# Altium PCB PCB_OBDH_ALT.PcbDoc
Units mil, origin at the board's own origin, x right, y up, seen from the top; angles counter-clockwise.
Board outline 3627.19 x 3509.21 mil, 2 copper layers (Top Layer, Bottom Layer), stack 65.792 mil thick; 1 components, 80 nets, 108 pads, 0 vias.
Unrouted connection lines stored in the file: 2.
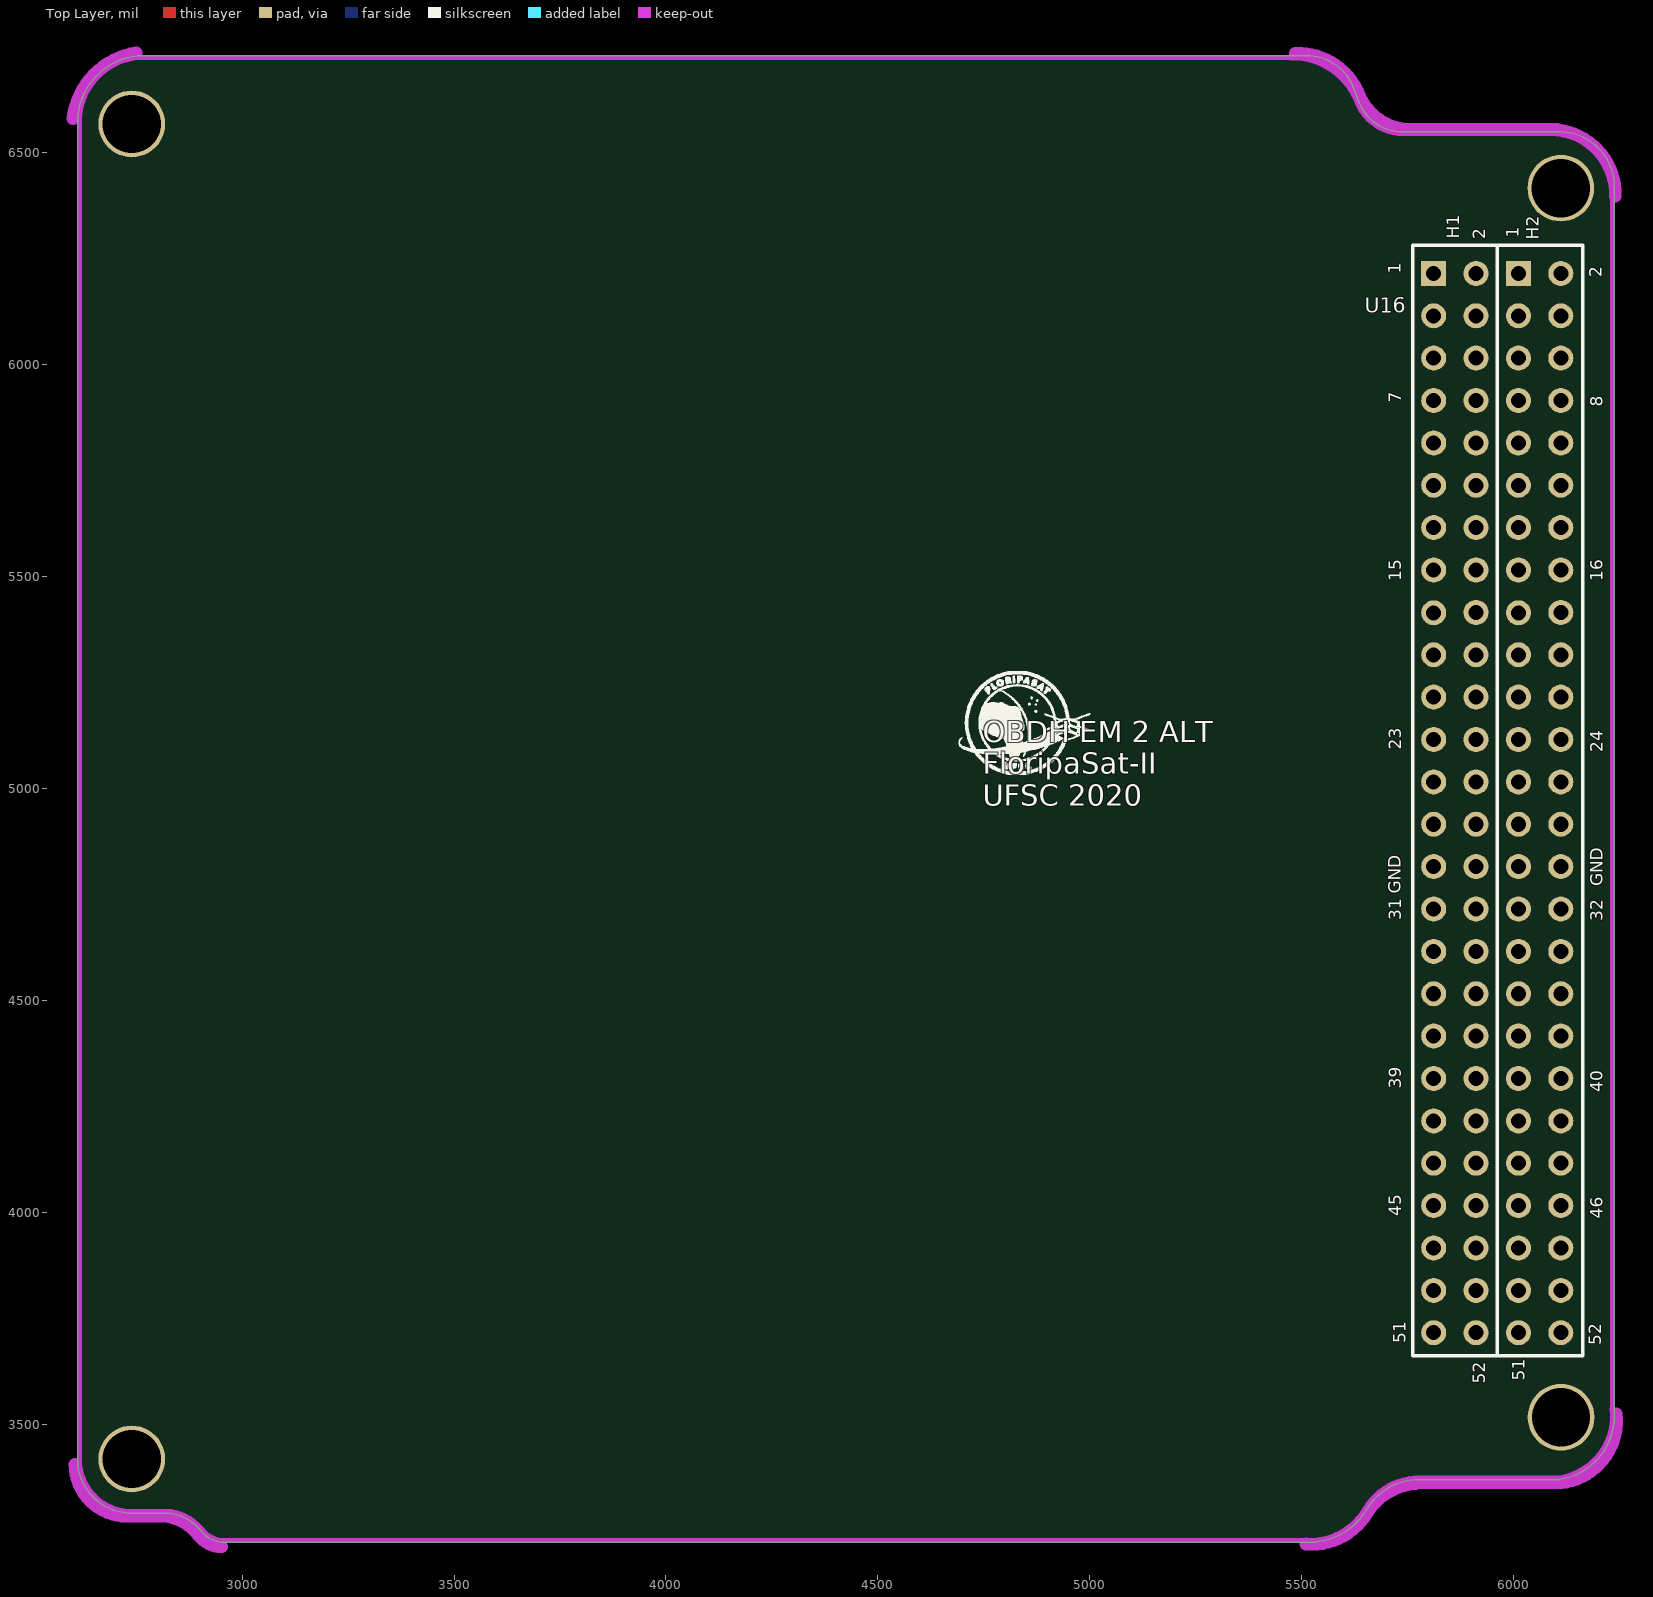
[diagram p0: Top Layer view]
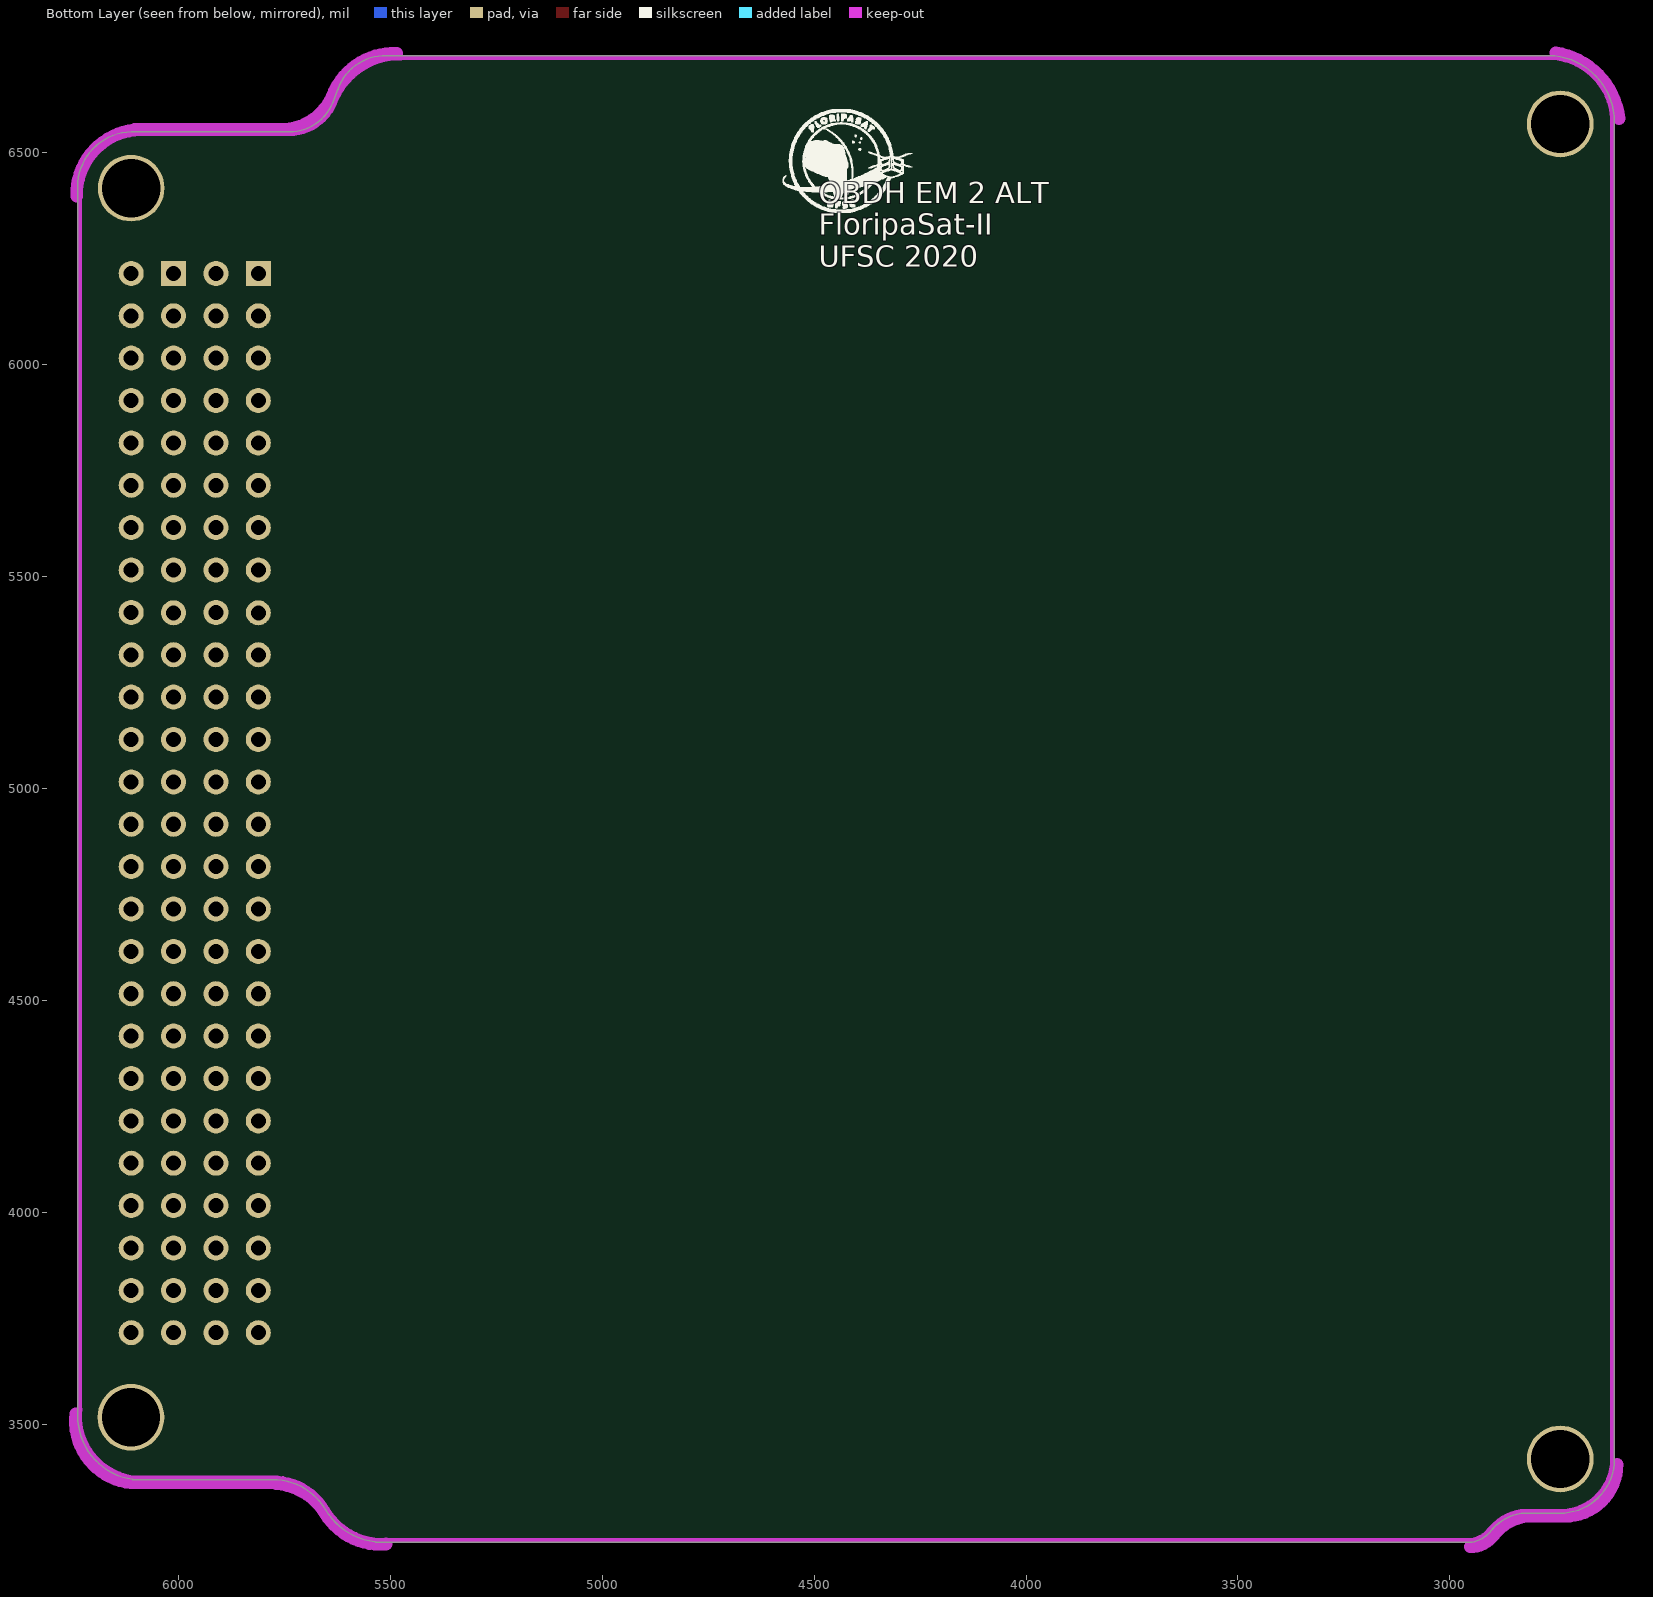
[diagram p1: Bottom Layer view, seen from below]

## Layer stack, top to bottom
Top Solder: solder mask 0.4, Solder Resist, Dk 3.5
Top Layer: signal copper 1.4
Dielectric1: core 62.9921, FR-4, Dk 4.8
Bottom Layer: signal copper 1.4
Bottom Solder: solder mask 0.4, Solder Resist, Dk 3.5

## Board outline
2831.44,3289.79 cw(c2812.42,3175.14) 2904.91,3245.51 ccw(c2908.9,3248.54) 2905.12,3245.25 ccw(c2959.02,3292.21) 2959.83,3220.73 ccw(c2959.02,3292.21) 2959.86,3220.73 2959.8,3220.73 5532.68,3220.73 ccw(c5532.68,3225.74) 5536.28,3222.25 ccw(c5517.9,3378.72) 5653.34,3298.25 ccw(c5649.03,3300.81) 5653.35,3298.26 cw(c5777.23,3224.98) 5766.72,3368.53 6105.67,3368.53 ccw(c6105.67,3373.54) 6108.5,3369.4 ccw(c6086.18,3519.83) 6238.26,3519.83 ccw(c6086.18,3519.83) 6237.57,3534.25 6237.57,6414.22 ccw(c6233.43,6417.05) 6238.44,6416.93 ccw(c6108.52,6419.9) 6238.47,6419.9 ccw(c6108.52,6419.9) 6111.49,6549.82 ccw(c6111.38,6544.8) 6111.38,6549.82 5739.03,6549.82 ccw(c5739.03,6544.8) 5738.79,6549.81 ccw(c5738.53,6544.8) 5738.55,6549.82 cw(c5739.03,6661.14) 5635.62,6619.92 ccw(c5630.97,6618.06) 5634.8,6621.29 5623.88,6649.65 ccw(c5619.2,6647.84) 5623.58,6650.28 ccw(c5618.56,6650.28) 5623.58,6650.28 ccw(c5618.56,6650.28) 5623.28,6651.99 ccw(c5512.63,6611.96) 5518.67,6729.47 ccw(c5516.57,6724.92) 5516.57,6729.94 2766.89,6729.94 ccw(c2766.89,6724.92) 2766.27,6729.9 ccw(c2765.97,6724.89) 2765.87,6729.91 ccw(c2769,6572.35) 2611.42,6573.52 ccw(c2616.3,6572.35) 2611.28,6572.35 2611.28,3416.85 ccw(c2616.3,3416.85) 2611.28,3416.81 ccw(c2739.33,3417.83) 2740.33,3289.79 ccw(c2739.33,3417.83) 2740.36,3289.79 2740.32,3289.79

## Design rules (kind name [scope] priority, off if disabled: settings)
Clearance Clearance_6 [InNet('GND') vs InNet('AGND')] p1: gap=15 ignorepadtopadclearanceinfootprint=FALSE except(0: Arc-Hole Track-Hole SMDPad-Hole THPad-Hole Via-Hole Fill-Hole Poly-Hole Region-Hole Text-Hole)
Clearance [All] p2: gap=7 ignorepadtopadclearanceinfootprint=FALSE except(0: Arc-Hole Track-Hole SMDPad-Hole THPad-Hole Via-Hole Fill-Hole Poly-Hole Region-Hole Text-Hole)
DiffPairsRouting DiffPairsRouting_1 [InDifferentialPair('XT2')] p1: maxlimit=10 minlimit=10 mostfreqgap=10 toplayer_minwidth=10 toplayer_maxwidth=10 toplayer_prefwidth=10 bottomlayer_minwidth=10 bottomlayer_maxwidth=10 bottomlayer_prefwidth=10 maxuncoupledlength=500
DiffPairsRouting [All] p2: maxlimit=10 minlimit=10 mostfreqgap=10 toplayer_minwidth=15 toplayer_maxwidth=15 toplayer_prefwidth=15 bottomlayer_minwidth=15 bottomlayer_maxwidth=15 bottomlayer_prefwidth=15 maxuncoupledlength=500
HoleSize [All] p1: absolutevalues=TRUE maxlimit=200 minlimit=1 maxpercent=80.000 minpercent=20.000
MinimumSolderMaskSliver [All] p1: minsoldermaskwidth=0
PlaneConnect [InNetClass('power')] p1: planeconnectstyle=Direct reliefexpansion=20 reliefentries=4 reliefconductorwidth=10 reliefairgap=10
PlaneConnect PlaneConnect_1 [All] p2: planeconnectstyle=Relief reliefexpansion=20 reliefentries=4 reliefconductorwidth=10 reliefairgap=10
PolygonConnect PolygonConnect_3 [InNet('GND') vs InNet('GND')] p1: connectstyle=Direct reliefconductorwidth=10 reliefentries=4 polygonreliefangle="90 Angle" airgapwidth=10
PolygonConnect PolygonConnect_2 [InNet('AGND') vs InNet('AGND')] p2: connectstyle=Direct reliefconductorwidth=10 reliefentries=4 polygonreliefangle="90 Angle" airgapwidth=10
PolygonConnect [InNetClass('power')] p3: connectstyle=Direct reliefconductorwidth=10 reliefentries=4 polygonreliefangle="90 Angle" airgapwidth=10
PolygonConnect PolygonConnect_1 [All] p4: connectstyle=Relief reliefconductorwidth=10 reliefentries=4 polygonreliefangle="90 Angle" airgapwidth=10
RoomDefinition 1_Interface [InComponentClass('1_Interface')] p1: confinementstyle=ConfineIn formatcopy=TRUE lockcomponents=FALSE outline 7026.38,6166.14 7794.88,6166.14 7794.88,6650.79 7026.38,6650.79
RoutingVias [All] p1: holewidth=10 width=20 viastyle="Through Hole" minholewidth=5 minwidth=10 maxholewidth=10 maxwidth=25
SilkToSilkClearance [All] p1: silktosilkclearance=5
SilkToSolderMaskClearance [IsPad] p1: minsilkscreentomaskgap=0 clearancetoexposedcopper=TRUE
SolderMaskExpansion [All] p1: expansion=7
Width Width_Power [InNetClass('Power')] p1: maxlimit=30 minlimit=20 preferedwidth=20
Width [All] p2: maxlimit=70 minlimit=5 preferedwidth=10
24 further rules are at their usual default settings.

## Classes and differential pairs
differential pair VSENSE2: +VSENSE2_P -VSENSE2_N
differential pair XT2: +XT2_P -XT2_N

## Components (designator, comment, footprint, x,y, rotation, side; value= is the part's Value field where it differs from the comment)
U16 "PC104_INTERNAL" PC104 6114.96,3715.75 r90 top locked

## Footprints (in the part's own frame and the unit in brackets; to place one, negate y for a bottom-side part, rotate by r counter-clockwise, add the part's x,y. Pads: shape width x height; smd on the part's side, far side on the other; paste and mask are expansions set on the pad)
PC104 [mm] "Connector; Header; 26x4 Position"
  rect 1.5x1.5 hole 0.9: H1-1(63.5,7.7) H2-1(63.5,2.625)
  round 1.5 hole 0.9: H1-2(63.5,5.16) H1-3(60.96,7.7) H1-4(60.96,5.16) H1-5(58.42,7.7) H1-6(58.42,5.16) H1-7(55.88,7.7) H1-8(55.88,5.16) H1-9(53.34,7.7) H1-10(53.34,5.16) H1-11(50.8,7.7) H1-12(50.8,5.16) H1-13(48.26,7.7) H1-14(48.26,5.16) H1-15(45.72,7.7) H1-16(45.72,5.16) H1-17(43.155,7.7) H1-18(43.18,5.16) H1-19(40.64,7.7) H1-20(40.64,5.16) H1-21(38.1,7.7) H1-22(38.1,5.16) H1-23(35.56,7.7) H1-24(35.56,5.16) H1-25(33.02,7.7) H1-26(33.02,5.16) H1-27(30.48,7.7) H1-28(30.48,5.16) H1-29(27.94,7.7) H1-30(27.94,5.16) H1-31(25.4,7.7) H1-32(25.4,5.16) H1-33(22.86,7.7) H1-34(22.86,5.16) H1-35(20.32,7.7) H1-36(20.32,5.16) H1-37(17.78,7.7) H1-38(17.78,5.16) H1-39(15.24,7.7) H1-40(15.24,5.16) H1-41(12.7,7.7) H1-42(12.7,5.16) H1-43(10.16,7.7) H1-44(10.16,5.16) H1-45(7.62,7.7) H1-46(7.62,5.16) H1-47(5.08,7.7) H1-48(5.08,5.16) H1-49(2.54,7.7) H1-50(2.54,5.16) H1-51(0,7.7) H1-52(0,5.16) H2-2(63.5,0.08) H2-3(60.96,2.62) H2-4(60.96,0.08) H2-5(58.42,2.62) H2-6(58.42,0.08) H2-7(55.88,2.62) H2-8(55.88,0.08) H2-9(53.34,2.625) H2-10(53.34,0.08) H2-11(50.8,2.625) H2-12(50.8,0.08) H2-13(48.26,2.62) H2-14(48.26,0.08) H2-15(45.72,2.62) H2-16(45.72,0.08) H2-17(43.155,2.62) H2-18(43.18,0.08) H2-19(40.64,2.62) H2-20(40.64,0.08) H2-21(38.1,2.62) H2-22(38.1,0.08) H2-23(35.56,2.62) H2-24(35.56,0.08) H2-25(33.02,2.62) H2-26(33.02,0.08) H2-27(30.48,2.62) H2-28(30.48,0.08) H2-29(27.94,2.62) H2-30(27.94,0.08) H2-31(25.4,2.62) H2-32(25.4,0.08) H2-33(22.86,2.62) H2-34(22.86,0.08) H2-35(20.32,2.62) H2-36(20.32,0.08) H2-37(17.78,2.62) H2-38(17.78,0.08) H2-39(15.24,2.62) H2-40(15.24,0.08) H2-41(12.7,2.62) H2-42(12.7,0.08) H2-43(10.16,2.62) H2-44(10.16,0.08) H2-45(7.62,2.62) H2-46(7.62,0.08) H2-47(5.08,2.62) H2-48(5.08,0.08) H2-49(2.54,2.62) H2-50(2.54,0.08) H2-51(0,2.62) H2-52(0,0.08)
  silkscreen extent -1.38,-1.22 65.18,8.97, body extent -1.47,-1.06 65.1,8.92, height 13.51

## Part data
U16: library part PC104, "PC104", Partnumber=ESQ-126-39-G-D

## Free pads (board coordinates)
  round 157.48 hole 137.8: 0(2739.33,3417.83) 1(6112.36,3516.26) 2(6112,6417) 3(2739.33,6568.43)

## Nets (pads, with @x,y where several pads share a name; then routed paths per layer and width w, separated by ;. In a path a pad name is that pad's centre, name@x,y a point inside that pad or via, vN(x,y) a via of type N, cw(c..) or ccw(c..) an arc to the next point about the centre after c; other vN are vias at no path point)
3V3_C_CURRENT_CIRCUIT: 
3V3_CURRENT_SENSING: 
3V3_MEMORY: 
\M\R\_WDOG: 
A3V3_OBDH: 
ADC_VCC_3V3: 
AGND: 
ANTENNA_DEBUG: 
GND: U16.H1-29 U16.H1-30 U16.H1-31 U16.H1-32 U16.H2-29 U16.H2-30 U16.H2-31 U16.H2-32
I2C0_SCL: U16.H1-43
I2C0_SDA: U16.H1-41
I2C1_SCL: 
I2C1_SDA: 
I2C2_SCL: 
I2C2_SDA: 
JTAG_TCK: 
JTAG_TDO: 
LED_SYSTEM: 
NetC27_1: 
NetC28_2: 
NetC39_1: 
NetD1_1: 
NetD3_1: 
NetD4_1: 
NetR27_1: 
NetR48_2: 
NetTP20_1: 
NetTP21_1: 
NetTP22_1: 
NetTP23_1: 
NetTP24_1: 
NetTP25_1: 
NetTP29_1: 
NetTP30_1: 
NetTP31_1: 
NetTP32_1: 
NetTP33_1: 
NetTP34_1: 
NetTP35_1: 
NetTP36_1: 
NetTP37_1: 
NetTP38_1: 
NetTP39_1: 
NetTP40_1: 
NetTP45_1: 
OBDH_CURRENT_ADC: 
PAYLOAD_0_EN: U16.H1-18
PAYLOAD_1_EN: U16.H1-20
SPI0_CLK: U16.H1-35
SPI0_CSN: U16.H1-40
SPI0_MISO: U16.H1-37
SPI0_MOSI: U16.H1-39
SPI1_CLK: 
SPI1_MISO: 
SPI1_MOSI: 
TTC_3V3_PA_EN: U16.H1-12
TTC_CTRL_RF_SWT_RX: U16.H1-5
TTC_CTRL_RF_SWT_TX: U16.H1-6
TTC_GPIO0_MAIN: U16.H1-7
TTC_GPIO1_MAIN: U16.H1-8
TTC_GPIO2_MAIN: U16.H1-9
TTC_RESETN_MAIN: U16.H1-11
UART0_RX: 
UART0_TX: 
UC_BEACON_0: U16.H2-12
UC_BEACON_1: U16.H2-11
UC_BEACON_2: U16.H2-14
UC_BEACON_3: U16.H2-13
VCC_3V3: 
VCC_3V3_DEPLOYMENT: U16.H2-35 U16.H2-36
VCC_3V3_SOURCE: U16.H1-45 U16.H1-46
VCC_5V_EN: U16.H1-13
VREF: 
VSENSE2_N: 
VSENSE2_P: 
WDI_EXT: 
XT1IN: 
XT1OUT: 
XT2_N: 
XT2_P: 
pads on no net: U16.H1-1 U16.H1-2 U16.H1-3 U16.H1-4 U16.H1-10 U16.H1-14 U16.H1-15 U16.H1-16 U16.H1-17 U16.H1-19 U16.H1-21 U16.H1-22 U16.H1-23 U16.H1-24 U16.H1-25 U16.H1-26 U16.H1-27 U16.H1-28 U16.H1-33 U16.H1-34 U16.H1-36 U16.H1-38 U16.H1-42 U16.H1-44 U16.H1-47 U16.H1-48 U16.H1-49 U16.H1-50 U16.H1-51 U16.H1-52 U16.H2-1 U16.H2-2 U16.H2-3 U16.H2-4 U16.H2-5 U16.H2-6 U16.H2-7 U16.H2-8 U16.H2-9 U16.H2-10 U16.H2-15 U16.H2-16 U16.H2-17 U16.H2-18 U16.H2-19 U16.H2-20 U16.H2-21 U16.H2-22 U16.H2-23 U16.H2-24 U16.H2-25 U16.H2-26 U16.H2-27 U16.H2-28 U16.H2-33 U16.H2-34 U16.H2-37 U16.H2-38 U16.H2-39 U16.H2-40 U16.H2-41 U16.H2-42 U16.H2-43 U16.H2-44 U16.H2-45 U16.H2-46 U16.H2-47 U16.H2-48 U16.H2-49 U16.H2-50 U16.H2-51 U16.H2-52

## Keep-outs
Keep-Out Layer:
  lines w10: 2616.3,6572.35 2616.3,3416.85 ccw(c2739.33,3417.83) 2740.31,3294.8 2831.85,3294.8 cw(c2812.42,3175.14) 2908.9,3248.54 ccw(c2959.02,3292.21) 2959.8,3225.74 5532.68,3225.74 ; 2616.46,6569.32 cw(c2769,6572.35) 2765.97,6724.89 ; 2766.89,6724.92 5476.94,6724.92 ; 5474.33,6723.77 cw(c5476.94,6559.08) 5631.83,6615.11 ; 5504.57,3226.78 ccw(c5517.9,3378.72) 5649.03,3300.81 cw(c5777.23,3224.98) 5766.54,3373.54 6105.67,3373.54 ; 5630.97,6618.06 ccw(c5739.03,6661.14) 5738.53,6544.8 ; 5739.03,6544.8 6111.38,6544.8 cw(c6108.52,6419.9) 6233.43,6417.05 ; 6101.97,3373.62 ccw(c6086.18,3519.83) 6232.3,3536.44 ; 6232.56,3529.84 6232.56,6419.91
  lines w30: 2600.39,6581.1 cw(c2778.8,6559.28) 2749.91,6736.67 ; 2605.12,3404.73 ccw(c2728.15,3405.71) 2729.13,3282.68 2820.67,3282.68 cw(c2801.24,3163.01) 2897.72,3236.42 ; 2901.07,3233.43 ccw(c2951.19,3277.1) 2951.97,3210.63 ; 5485.83,6735.04 cw(c5491.51,6579.93) 5630.4,6649.22 ; 5510.37,3216.89 ccw(c5523.7,3368.84) 5647.64,3279.92 ; 5631.59,6647.95 ccw(c5758.64,6688.44) 5749.21,6555.43 6103.46,6555.43 ; 5651.97,3286.61 cw(c5780.17,3210.78) 5769.47,3359.35 ; 5773.07,3361.42 6112.2,3361.42 ccw(c6096.42,3507.63) 6242.54,3524.23 ; 6090.82,6555 cw(c6087.32,6401.7) 6240.61,6398.2

## Silkscreen, mask and mechanical layers (free items; w line width, h text height)
Top Overlay:
  drawing of 1547 lines, arcs and shapes, not listed
  text "7" at 5735.43,5910.24 h29.53 r90
  text "8" at 6210.24,5900.79 h29.53 r90
  text "15" at 5735.43,5488.98 h29.53 r90
  text "16" at 6210.24,5488.98 h29.53 r90
  text "23" at 5735.43,5092.13 h29.53 r90
  text "24" at 6210.24,5085.43 h29.53 r90
  text "OBDH EM 2 ALT / FloripaSat-II / UFSC 2020" at 4747.64,4959.84 h50
  text "GND" at 6210.24,4768.9 h29.53 r90
  text "GND" at 5733.86,4751.97 h29.53 r90
  text "31" at 5735.43,4689.76 h29.53 r90
  text "32" at 6210.24,4687.01 h29.53 r90
  text "39" at 5735.43,4290.94 h29.53 r90
  text "40" at 6210.24,4283.86 h29.53 r90
  text "45" at 5735.43,3990.55 h29.53 r90
  text "46" at 6210.24,3985.04 h29.53 r90
Bottom Overlay:
  drawing of 1531 lines, arcs and shapes, not listed
  text "OBDH EM 2 ALT / FloripaSat-II / UFSC 2020" at 4489.37,6231.5 h50
Mechanical 1:
  lines w10: 2258.66,6727.56 6438.19,6727.17 ; 2335.04,3220.87 6406.69,3220.48 ; 2387.17,3280.9 2407.09,3220.87 ; 2392.12,6668.38 2412.2,6728.35 ; 2397.09,3220.88 2417.09,3220.85 ; 2402.2,6728.36 2422.2,6728.33 ; 2409.07,4578.73 2407.09,3220.87 ; 2410.22,5370.48 2412.2,6728.35 ; 2427.17,3280.84 2407.09,3220.87 ; 2432.12,6668.32 2412.2,6728.35 ; 2544.88,444.09 8222.92,444.09 8222.92,1498.33 ; 2568.5,444.09 885.43,444.09 885.43,7329.53 8222.92,7329.53 8222.92,447.64 ; 2572.92,444.09 2572.92,1496.32 8222.92,1496.32 ; 2572.92,621.32 7822.92,621.32 ; 2572.92,808.82 8222.92,808.82 ; 2572.92,996.32 8218.69,996.32 ; 2613.79,2999.61 2614.17,7069.69 ; 2614.55,6999.37 2614.58,6979.37 ; 2674.54,7009.44 2614.57,6989.37 ; 2674.59,6969.44 2614.57,6989.37 ; 4028.93,6991.06 2614.57,6989.37 ; 4410.42,621.32 4410.42,996.32 ; 4820.68,6992.01 6235.04,6993.7 ; 6175.02,7013.63 6235.04,6993.7 ; 6175.06,6973.63 6235.04,6993.7 ; 6222.92,433.82 6222.92,1496.32 ; 6222.92,621.32 8222.92,621.32 ; 6235.05,6983.7 6235.03,7003.7 ; 6235.44,3061.02 6235.82,7099.21 ; 6300,3456 6320,3516 ; 6300,3776.24 6320,3716.24 ; 6310,3516 6330,3516 ; 6310,3716.24 6330,3716.24 ; 6320,3416 6320,3516 ; 6320,3816.24 6320,3716.24 ; 6340,3456 6320,3516 ; 6340,3776.24 6320,3716.24 ; 6378,6156.76 6398,6216.76 ; 6378,6477 6398,6417 ; 6388,6216.76 6408,6216.76 ; 6388,6417 6408,6417 ; 6398,6116.76 6398,6216.76 ; 6398,6517 6398,6417 ; 6418,6156.76 6398,6216.76 ; 6418,6477 6398,6417 ; 7222.92,433.82 7222.92,808.82 ; 7374.2,989.52 7374.2,1497.24
  text "3620.475 (mil)" at 4038.97,6955.08 h60 r0.07
  text "200.24 (mil)" at 6541.96,5990.98 h60 r90
  text "3507.484 (mil)" at 2445.07,4588.68 h60 r89.92
  text "200.24 (mil)" at 6463.96,3290.22 h60 r90
  text "General SPEC:" at 6386.41,2347.94 h121.88
  text "Cupper base 1OZ:" at 6369.68,2192.81 h68.12
  text "PCB Material: FR4" at 6362.6,2090.16 h68.12
  text "PCB Tickness: 1.6mm" at 6368.46,1981.91 h68.12
  text "PCB Surface: ENIG" at 6365.53,1873.67 h68.12
  text "Vias: Force Complete Tenting" at 6351.57,1768.11 h68.12
  text "VER." at 7505.69,1340.54 h95
  text "TITULO: OBDH 2018" at 2651.57,1320.08 h100
  text "REV." at 6366.33,1315.19 h95
  text "Eng_2_ALT" at 7485.43,1107.48 h75.62
  text "01" at 6404.17,1085.81 h75.62
  text "UFSC" at 2662.6,1050.39 h75.62
  text "MATERIAL:" at 2610.42,871.32 h75.62
  text "FR4" at 3272.92,871.32 h75.62
  text "Silkscreen color: white" at 4472.92,871.32 h75.62
  text "1.6mm" at 3771.73,701.54 h75.62
  text "Drawing" at 6284.19,695.41 h75.62
  text "Board Tickness:" at 2610.42,683.82 h75.62
  text "Layers: 02" at 4472.92,683.82 h75.62
  text "DATE" at 7587.92,679.82 h75.62
  text "01/12/2019" at 7403.15,504.33 h75.62
  text "Andre M. P. Mattos" at 6270.84,490.78 h68.12
  text "PCB Surface: ENIG" at 2618.73,479.2 h68.12
ASM Top:
  lines w3.94: 5762,3661.74 5762,6273.94 6163,6273.94 6163,3661.74 5762,3661.74
  text "U16" at 5866.93,5646.06 h39.37 r90

## Text inside footprints (layer, text, board x,y; h text height)
U16: Top Overlay "1" at 6012.6,6300.39 h29.53 r90; Top Overlay "2" at 6208.66,6207.09 h29.53 r90; Top Overlay "2" at 5933.46,6296.85 h29.53 r90; Top Overlay "1" at 5734.65,6214.57 h29.53 r90; Top Overlay "52" at 6207.09,3686.61 h29.53 r90; Top Overlay "51" at 6026.38,3602.36 h29.53 r90; Top Overlay "51" at 5746.46,3691.34 h29.53 r90; Top Overlay "52" at 5933.86,3594.88 h29.53 r90; Top Overlay "H2" at 6059.45,6295.67 h29.53 r90; Top Overlay "H1" at 5871.65,6298.03 h29.53 r90; ASM Top "PC104" at 5924.8,5642.91 h39.37 r90